# Altium PCB piano1组.PcbDoc
Units mil, origin at the board's own origin, x right, y up, seen from the top; angles counter-clockwise.
Board outline 3759.84 x 3838.58 mil, 2 copper layers (Top Layer, Bottom Layer); 40 components, 39 nets, 194 pads, 10 vias.
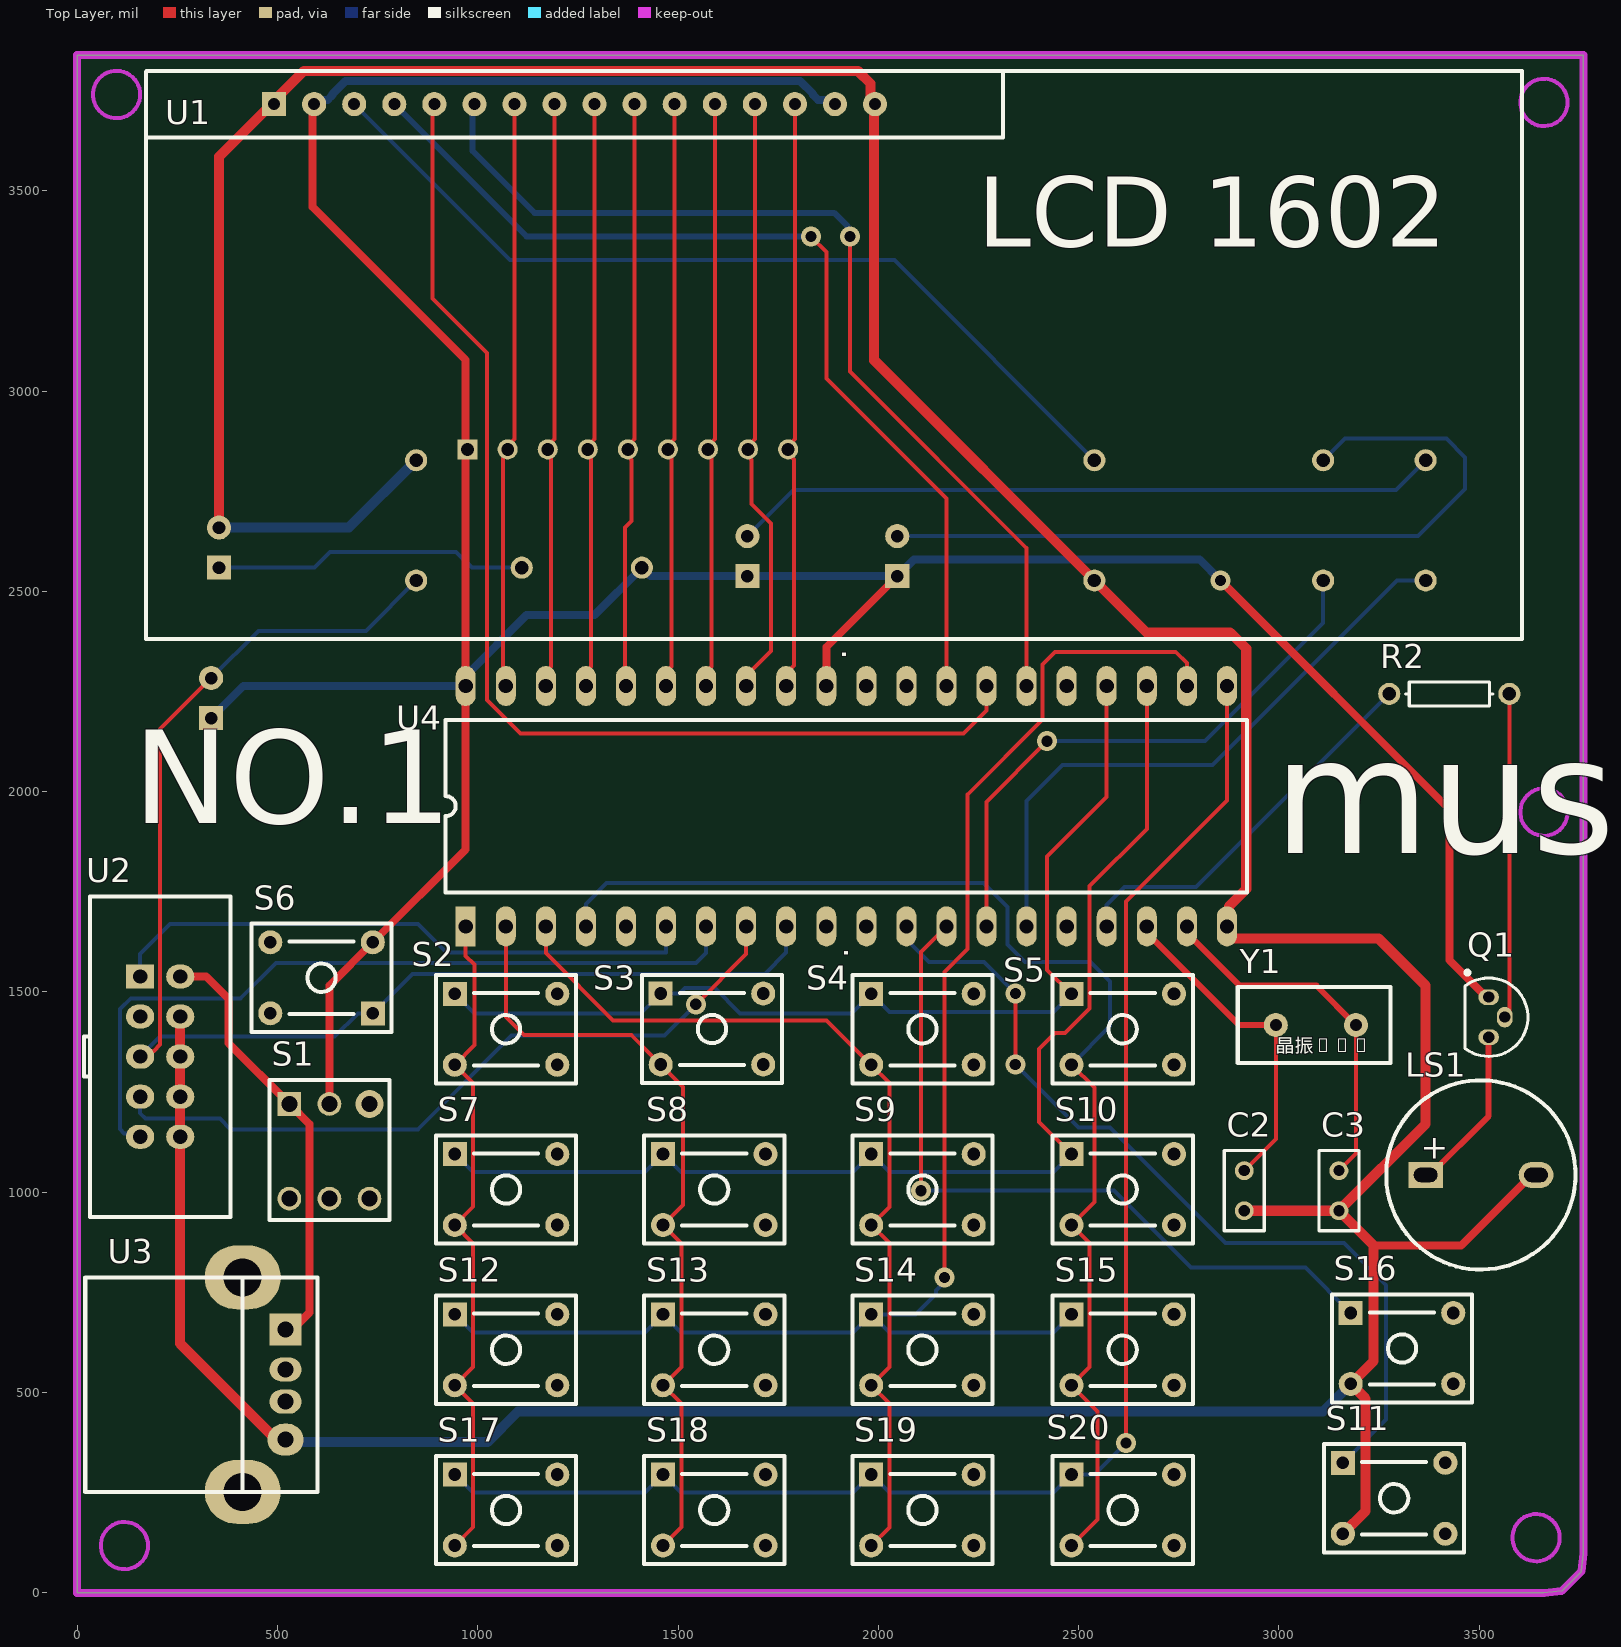
[diagram p0: Top Layer view]
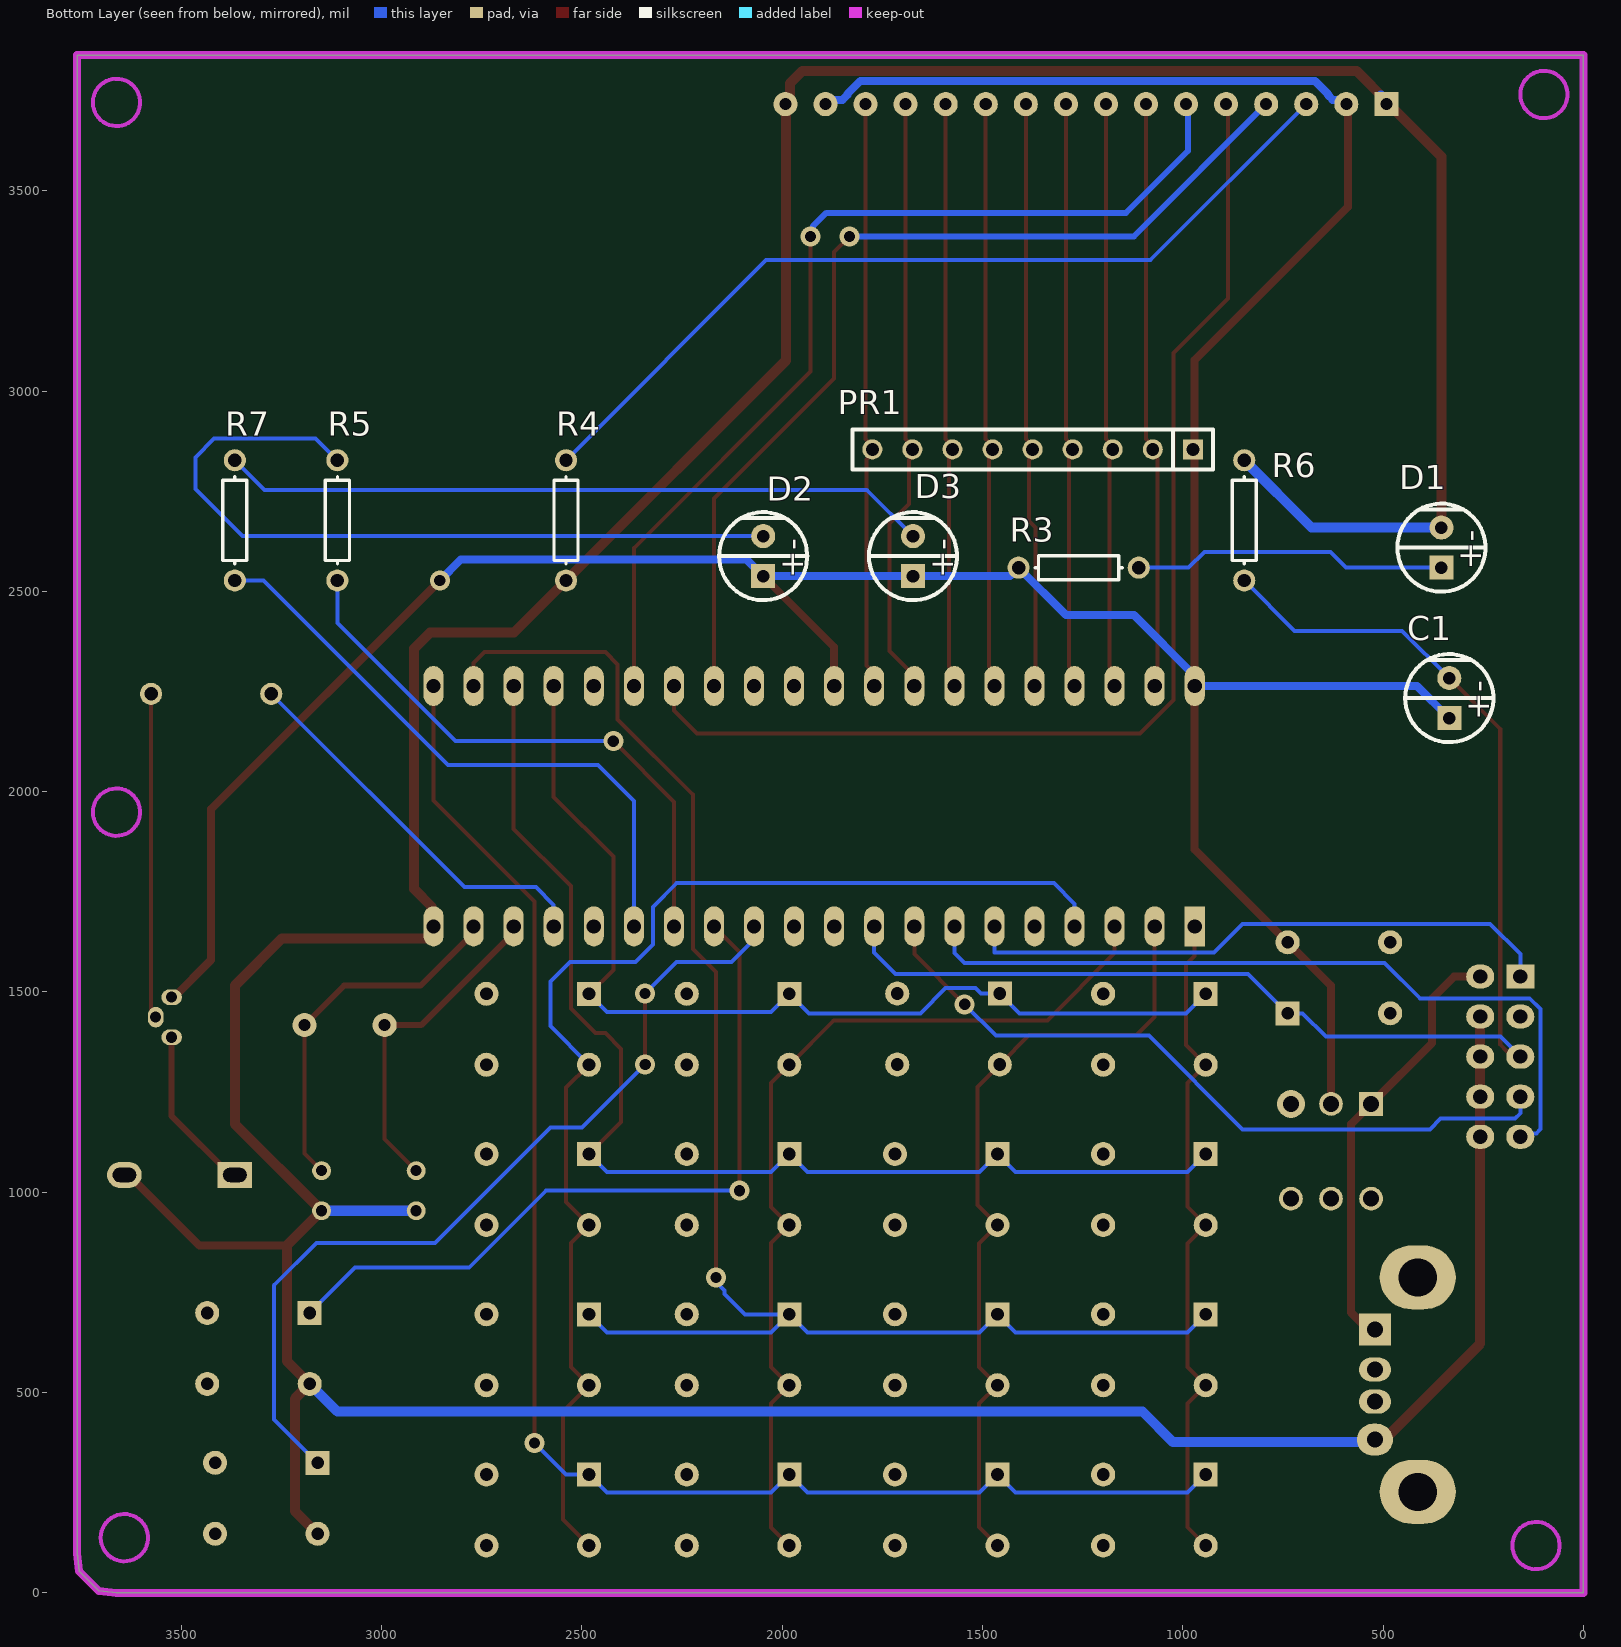
[diagram p1: Bottom Layer view, seen from below]

## Layer stack, top to bottom
Top Solder: solder mask 0.4, Solder Resist, Dk 3.5
Top Layer: signal copper 1.4
Dielectric 1: dielectric 12.6, FR-4, Dk 4.8
Bottom Layer: signal copper 1.4
Bottom Solder: solder mask 0.4, Solder Resist, Dk 3.5

## Board outline
0,0 0,3838.58 3759.84,3838.58 3759.84,98.43 3754.92,54.13 3705.71,4.92 3661.42,0

## Design rules (kind name [scope] priority, off if disabled: settings)
Clearance [All] p1: gap=10 ignorepadtopadclearanceinfootprint=FALSE
PolygonConnect [All] p1: connectstyle=Relief reliefconductorwidth=10 reliefentries=4 polygonreliefangle="90 Angle" airgapwidth=10
RoutingVias [All] p1: holewidth=28 width=50 viastyle="Through Hole" minholewidth=28 minwidth=50 maxholewidth=28 maxwidth=50
SolderMaskExpansion [All] p1: expansion=4 istentingtop=FALSE
Width Width_V [InNet('V')] p1: maxlimit=50 minlimit=10 preferedwidth=20 minimp=50.000000 maximp=50.000000 favimp=50.000000
Width Width_GND [InNet('GND')] p2: maxlimit=50 minlimit=10 preferedwidth=25 minimp=50.000000 maximp=50.000000 favimp=50.000000
Width Width_VCC [InNet('VCC')] p3: maxlimit=50 minlimit=10 preferedwidth=20 minimp=50.000000 maximp=50.000000 favimp=50.000000
Width [All] p4: maxlimit=15 minlimit=10 preferedwidth=10 minimp=50.000000 maximp=50.000000 favimp=50.000000
30 further rules are at their usual default settings.

## Components (designator, comment, footprint, x,y, rotation, side; value= is the part's Value field where it differs from the comment)
C1 "Cap Pol1" RB0.1 334.65,2183.46 r90 bottom value=10uF
C2 "Cap" RAD-0.1 2913.39,1003.94 r90 top value=30pF
C3 "Cap" RAD-0.1 3149.61,1003.94 r90 top value=30pF
D1 "LED0" RB0.1 354.33,2559.06 r90 bottom
D2 "LED0" RB0.1 2047.24,2537.8 r90 bottom
D3 "LED0" RB0.1 1673.23,2537.8 r90 bottom
LS1 "Speaker" Speaker 3503.94,1043.31 r0 top
PR1 "PR" SIP9 974.8,2854.33 r270 bottom
Q1 "2N3906" TO-92-M 3523.62,1437.01 r270 top
R2 "1K" AXIAL-0.3 3425.2,2244.09 r180 top value=10K
R3 "510" AXIAL-0.3 1259.84,2559.06 r180 bottom
R4 "1K" AXIAL-0.3 2539.37,2677.17 r270 bottom value=10K
R5 "1K" AXIAL-0.3 3110.24,2677.17 r90 bottom value=10K
R6 "10K" AXIAL-0.3 846.46,2677.17 r270 bottom
R7 "1K" AXIAL-0.3 3366.14,2677.17 r90 bottom value=10K
S1 "SW-SPDT" "KEY-6 - duplicate" 529.92,1220.47 r0 top
S2 "" SPST6*6 1070.71,1406.91 r0 top
S3 "" SPST6*6 1584.64,1407.48 r0 top
S4 "" SPST6*6 2110.08,1406.91 r0 top
S5 "" SPST6*6 2610.08,1406.91 r0 top
S6 "RESET" SPST6*6 610.24,1535.43 r180 top
S7 "" SPST6*6 1070.71,1006.91 r0 top
S8 "" SPST6*6 1590.39,1006.91 r0 top
S9 "" SPST6*6 2110.08,1006.91 r0 top
S10 "" SPST6*6 2610.08,1006.91 r0 top
S11 "RESET" SPST6*6 3287.4,236.22 r0 top
S12 "" SPST6*6 1070.71,606.91 r0 top
S13 "" SPST6*6 1590.39,606.91 r0 top
S14 "" SPST6*6 2110.08,606.91 r0 top
S15 "" SPST6*6 2610.08,606.91 r0 top
S16 "RESET" SPST6*6 3307.09,610.24 r0 top
S17 "" SPST6*6 1070.71,206.91 r0 top
S18 "" SPST6*6 1590.39,206.91 r0 top
S19 "" SPST6*6 2110.08,206.91 r0 top
S20 "" SPST6*6 2610.08,206.91 r0 top
U1 "lcd1602" LCD1602 491.73,3716.14 r180 top
U2 "ISP" IDC10 157.48,1538.58 r0 top
U3 "USB-A" USB_A 520.39,657.4 r90 top
U4 "AT89S52" DIP40_51MCU 970.08,1663.78 r90 top
Y1 "12M" XTAL1 3192.13,1417.32 r90 top

## Footprints (in the part's own frame and the unit in brackets; to place one, negate y for a bottom-side part, rotate by r counter-clockwise, add the part's x,y. Pads: shape width x height; smd on the part's side, far side on the other; paste and mask are expansions set on the pad)
AXIAL-0.3 [mm] "Axial Device, Thru-Hole; 2 Leads; 0.3 in Pin Spacing"
  round 1.4 hole 0.85: 1(-3.81,0) 2(3.81,0)
  silkscreen extent -2.77,-0.76 2.77,0.76
DIP40_51MCU [mm]
  rect 2.54x1.27 hole 0.9: 1(0,0)
  oval 2.54x1.27 hole 0.9: 2(0,-2.54) 3(0,-5.08) 4(0,-7.62) 5(0,-10.16) 6(0,-12.7) 7(0,-15.24) 8(0,-17.78) 9(0,-20.32) 10(0,-22.86) 11(0,-25.4) 12(0,-27.94) 13(0,-30.48) 14(0,-33.02) 15(0,-35.56) 16(0,-38.1) 17(0,-40.64) 18(0,-43.18) 19(0,-45.72) 20(0,-48.26) 21(15.24,-48.26) 22(15.24,-45.72) 23(15.24,-43.18) 24(15.24,-40.64) 25(15.24,-38.1) 26(15.24,-35.56) 27(15.24,-33.02) 28(15.24,-30.48) 29(15.24,-27.94) 30(15.24,-25.4) 31(15.24,-22.86) 32(15.24,-20.32) 33(15.24,-17.78) 34(15.24,-15.24) 35(15.24,-12.7) 36(15.24,-10.16) 37(15.24,-7.62) 38(15.24,-5.08) 39(15.24,-2.54) 40(15.24,0)
  silkscreen extent 2.16,-49.53 13.08,1.27
IDC10 [mil]
  rect 70x60 hole 35.43: 1(0,0)
  oval 70x60 hole 35.43: 2(100,0) 3(0,-100) 4(100,-100) 5(0,-200) 6(100,-200) 7(0,-300) 8(100,-300) 9(0,-400) 10(100,-400)
  silkscreen extent -140,-600 225,200
"KEY-6 - duplicate" [mm]
  rect 1.5x1.5 hole 1: 1(0,0)
  round 1.5 hole 1: 2(2.54,0) 4(5.08,-6) 5(2.54,-6) 6(0,-6)
  round 1.778 hole 1: 3(5.08,0)
  silkscreen extent -1.27,-7.37 6.35,1.52
LCD1602 [mil]
  rect 60x60 hole 30: 1(0,0)
  round 60 hole 30: 2(-100,0) 3(-200,0) 4(-300,0) 5(-400,0) 6(-500,0) 7(-600,0) 8(-700,0) 9(-800,0) 10(-900,0) 11(-1000,0) 12(-1100,0) 13(-1200,0) 14(-1300,0) 15(-1400,0) 16(-1500,0)
  silkscreen extent -3115,-83 320,1335
RAD-0.1 [mm] "Radial Cap, Thru-Hole; 2 Leads; 0.1 in Pin Spacing"
  round 1.2 hole 0.7: 1(-1.27,0) 2(1.27,0)
  silkscreen extent -2.54,-1.27 2.54,1.27
RB0.1 [mil]
  rect 60x60 hole 31.5: 1(0,0)
  round 60 hole 31.5: 2(100,0)
  silkscreen extent -60,-110 160,110
SIP9 [mil]
  rect 50x50 hole 32: 1(0,0)
  round 50 hole 32: 2(0,-100) 3(0,-200) 4(0,-300) 5(0,-400) 6(0,-500) 7(0,-600) 8(0,-700) 9(0,-800)
  silkscreen extent -50,-850 50,50
Speaker [mm]
  rect 2.2x1.651 hole 0.9 slot 1.5 at 0 deg: 1(-3.5,0)
  oval 2.2x1.651 hole 0.9 slot 1.5 at 0 deg: 2(3.5,0)
  silkscreen extent -6,-6 6,6, body extent -6,-6 6,6, height 9.6
SPST6*6 [mil]
  rect 60x60 hole 31.5: 1(-127.95,88.58)
  round 60 hole 31.5: 2(-127.95,-88.58) 3(127.95,88.58) 4(127.95,-88.58)
  silkscreen extent -175,-135 175,135
TO-92-M [mm]
  oval 1x1.3 hole 0.7: 1(-1.27,0) 3(1.27,0)
  oval 1.3x1 hole 0.7: 2(0,1.016)
  silkscreen extent -2.95,-1.5 2.48,2.48
USB_A [mil]
  rect 80x80 hole 40: 1(0,0)
  oval 60x80 hole 40: 2(-100,0) 3(-180,0)
  oval 80x90 hole 40: 4(-275,0)
  oval 160x190 hole 95: 5(-405,107) 6(130,107)
  silkscreen extent -405,-80 130,500
XTAL1 [mil]
  round 60 hole 30: 1(0,0) 2(0,200)
  silkscreen extent -95,-86 95,295

## Part data
C1: "Polarized Capacitor (Radial)", LatestRevisionDate=17-Jul-2002, LatestRevisionNote="Re-released for DXP Platform.", PackageDescription="Polarized Capacitor (Radial); 2 Leads", PackageReference=RB7.6-15, Published=8-Jun-2000, Publisher="Altium Limited"
C2 C3: "Capacitor", LatestRevisionDate=17-Jul-2002, LatestRevisionNote="Re-released for DXP Platform.", PackageDescription="Radial Cap, Thru-Hole; 2 Leads; 0.3 in Pin Spacing", PackageReference=RAD-0.3, Published=8-Jun-2000, Publisher="Altium Limited"
D1 D2 D3: "Typical INFRARED GaAs LED", LatestRevisionDate=08-Jul-2005, LatestRevisionNote="Mech Layer 1 removed.", PackageDescription="LED; 2 Leads", PackageReference=LED-0, Published=8-Jun-2000, Publisher="Altium Limited"
LS1: "Loudspeaker", LatestRevisionDate=17-Jul-2002, LatestRevisionNote="Re-released for DXP Platform.", PackageReference=PIN2, Published=24-Mar-1999, Publisher="Altium Limited"
Q1: "PNP General Purpose Amplifier", ComponentLink1Description="Manufacturer Link", ComponentLink1URL=http://www.fairchildsemi.com/, ComponentLink2Description=Datasheet, ComponentLink2URL=http://www.fairchildsemi.com/ds/2N%2F2N3906.pdf, DatasheetVersion=1997, LatestRevisionDate=15-Jan-2003, LatestRevisionNote="PCB Footprint 'BCY-W3/D4.7' replaced", PackageDescription="TO, Flat Index; 3 In-Line, Axial Leads; Body Dia. 4.5mm; Leads 0.51 x 0.48 mm (max)", PackageReference=TO-92A, PackageVersion=Sep-1998, Published=8-Jun-2000, Publisher="Altium Limited"
R2 R3 R4 R5 R6 R7: library part Res2, "Resistor", LatestRevisionDate=17-Jul-2002, LatestRevisionNote="Re-released for DXP Platform.", PackageDescription="Axial Device, Thru-Hole; 2 Leads; 0.4 in Pin Spacing", PackageReference=AXIAL-0.4, Published=8-Jun-2000, Publisher="Altium Limited"
S1: "SPDT Subminiature Toggle Switch, Right Angle Mounting, Vertical Actuation", ComponentLink1Description="Manufacturer Link", ComponentLink1URL=http://www.apem.com, DatasheetVersion=05-Dec-2000, LatestRevisionDate=17-Dec-2003, LatestRevisionNote="Schematic revised, PCB Footprint replaced.", PackageDescription="Switch; 4 Leads", PackageReference=TL36WW15050, Published=24-Mar-1999, Publisher="Altium Limited"
S2 S3 S4 S5 S6 S7 S8 S9 S10 S11 S12 S13 S14 S15 S16 S17 S18 S19 S20: library part SW-PB, "Switch", LatestRevisionDate=17-Jul-2002, LatestRevisionNote="Re-released for DXP Platform.", PackageDescription="Switch; 2 Leads", PackageReference=SPST-2, Published=24-Mar-1999, Publisher="Altium Limited"
Y1: library part XTAL, "Crystal Oscillator", LatestRevisionDate=17-Jul-2002, LatestRevisionNote="Re-released for DXP Platform.", PackageDescription="Crystal, Thru-Hole; 2 Leads; Body 3.1 x 8.2 mm (Dia.xH)", PackageReference=R38, Published=8-Jun-2000, Publisher="Altium Limited"

## Via types
v1: diameter 50, hole 28, Top Layer to Bottom Layer, 10 vias

## Nets (pads, with @x,y where several pads share a name; then routed paths per layer and width w, separated by ;. In a path a pad name is that pad's centre, name@x,y a point inside that pad or via, vN(x,y) a via of type N, cw(c..) or ccw(c..) an arc to the next point about the centre after c; other vN are vias at no path point)
EN: U1.6 U4.26 | length 2467.6
  Top Layer w10: v1(1929.13,3385.83) 1929.13,3048.55 2370.08,2607.61 U4.26
  Bottom Layer w15: U1.6@987.4,3720.47 987.4,3599.21 1141.73,3444.88 1889.76,3444.88 1922.44,3412.21 1922.44,3392.52 v1(1929.13,3385.83)
GND: C2.1 C3.1 D1.2 LS1.2 R4.2 R6.1 S11.2 S16.2 U1.1 U1.16 U2.4 U2.6 U2.8 U2.10 U3.4 U4.20 | length 12854.4
  Top Layer w20: 3236.36,867.18 3454.8,867.18 3630.93,1043.31 LS1.2
  Top Layer w25: U2.4 U2.6 U2.8 U2.10 257.48,622.2 503.5,376.18 U3.4@531.5,376.18 ; D1.2 354.33,3585.04 U1.1@489.76,3720.47 ; U1.1@487.4,3720.47 566.14,3799.21 1948.82,3799.21 1980.7,3767.33 1980.7,3727.17 U1.16@1987.4,3720.47 ; U1.16@1989.76,3720.47 1989.76,3076.77 R4.2 2669.21,2397.32 2878.36,2397.32 2918.36,2357.32 2918.36,1756.94 2874.86,1713.44 2874.86,1646.1 2870.08,1641.32 2877.4,1634 2897.09,1634 2897.22,1633.86 3248.03,1633.86 3366.14,1515.75 3366.14,1170.72 3149.36,953.94 C2.1 ; C3.1 3236.36,867.18 3236.36,578.88 S16.2 3216.36,484.43 3216.36,204.55 S11.2
  Bottom Layer w25: D1.2 678.35,2659.05 R6.1 ; U1.1@487.4,3720.47 U1.1@504.9,3737.97 ; U3.4@531.5,376.18 1024.22,376.18 1100.8,452.76 3110.24,452.76 S16.2 ; C2.1 C3.1
NetC2_2: C2.2 U4.18 Y1.2 | length 829.2
  Top Layer w10: C2.2 2992.13,1132.68 Y1.2
  Top Layer w15: U4.18 2670.08,1648.25 2901.01,1417.32 Y1.2
NetC3_2: C3.2 U4.19 Y1.1 | length 914.2
  Top Layer w10: C3.2 3192.13,1096.46 Y1.1
  Top Layer w15: U4.19 2770.08,1648.25 2902.58,1515.75 3093.7,1515.75 Y1.1
NetD1_1: D1.1 R3.2 | length 788.1
  Bottom Layer w10: D1.1 592.36,2559.05 631.73,2598.43 946.26,2598.43 985.63,2559.05 R3.2
NetD2_2: D2.2 R5.2 | length 1941.1
  Bottom Layer w10: D2.2 3346.46,2637.79 3464.57,2755.91 3464.57,2834.65 3417.89,2881.32 3164.39,2881.32 R5.2
NetD3_2: D3.2 R7.2 | length 1771.4
  Bottom Layer w10: D3.2 1788.76,2753.32 3292.3,2753.32 R7.2
NetLS1_1: LS1.1 Q1.3 | length 415.3
  Top Layer w15: LS1.1 3376.95,1043.31 3523.62,1189.98 Q1.3
NetQ1_2: Q1.2 R2.1 | length 807.3
  Top Layer w10: R2.1 3575.36,2244.09 Q1.2@3575.36,1437.01
NetR4_1: R4.1 U1.3 | length 2222
  Bottom Layer w10: U1.3@687.4,3720.47 1081.1,3326.77 2039.76,3326.77 R4.1
P00: PR1.2 U1.7 U4.39 | length 1467.2
  Top Layer w10: U4.39 1062.99,2270.86 1062.99,2831.7 1074.8,2843.51 1074.8,2863.26 1091.73,2880.19 U1.7
P01: PR1.3 U1.8 U4.38 | length 1474.6
  Top Layer w10: U4.38 1170.08,2299.6 1183.4,2312.93 1183.4,2834.91 1182.46,2835.85 PR1.3@1182.46,2863.61 ; PR1.3 1183.27,2862.8 1183.27,2871.72 1191.73,2880.19 U1.8
P02: PR1.4 U1.9 U4.37 | length 1472.7
  Top Layer w10: U4.37 1270.08,2299.6 1283.4,2312.93 1283.4,2834.91 1282.46,2835.85 PR1.4@1282.46,2861.71 ; PR1.4 1282.32,2861.85 1282.32,2870.78 1291.73,2880.19 U1.9
P03: PR1.5 U1.10 U4.36 | length 1475
  Top Layer w10: U4.36 1367.28,2266.57 1367.28,2659.42 1383.4,2675.54 1383.4,2828.47 1382.46,2829.42 PR1.5@1382.46,2861.71 ; PR1.5 1382.32,2861.85 1382.32,2870.78 1391.73,2880.19 U1.10
P04: PR1.6 U1.11 U4.35 | length 1457.4
  Top Layer w10: U4.35 1470.08,2299.6 1483.4,2312.93 1483.4,2834.91 1482.46,2835.85 1482.46,2845.06 PR1.6@1483.4,2846 ; PR1.6 1474.8,2863.26 1491.73,2880.19 U1.11
P05: PR1.7 U1.12 U4.34 | length 1472.7
  Top Layer w10: U4.34 1570.08,2299.6 1583.4,2312.93 1583.4,2834.91 1582.46,2835.85 PR1.7@1582.46,2861.71 ; PR1.7 1582.32,2861.85 1582.32,2870.78 1591.73,2880.19 U1.12
P06: PR1.8 U1.13 U4.33 | length 1509
  Top Layer w10: U4.33 1670.08,2288.78 1732.28,2350.98 1732.28,2668.92 1683.4,2717.8 1683.4,2828.47 1682.46,2829.42 1682.46,2846.68 PR1.8 1674.8,2863.26 1691.73,2880.19 U1.13
P07: PR1.9 U1.14 U4.32 | length 1483.9
  Top Layer w10: U4.32 1770.08,2294.95 1789.76,2314.64 1789.76,2828.55 1782.46,2835.85 1782.46,2847.02 1789.76,2854.33 PR1.9@1782.46,2861.64 ; PR1.9 1782.28,2861.81 1782.28,2870.74 1791.73,2880.19 U1.14
P10: S2.2 S7.2 S12.2 S17.2 U4.1 | length 1688.6
  Top Layer w10: S17.2 988.36,163.93 988.36,472.72 S12.2 988.36,563.93 988.36,872.72 S7.2 988.36,963.93 988.36,1272.72 S2.2 992.36,1367.93 992.36,1568.04 970.08,1590.32 U4.1
P11: S3.2 S8.2 S13.2 S18.2 U4.2 | length 1982.5
  Top Layer w10: U4.2 1070.08,1437.32 1115.08,1392.32 1383.27,1392.32 S3.2 1512.36,1263.23 1512.36,968.24 S8.2 1508.36,872.4 1508.36,564.24 S13.2 1508.36,472.4 1508.36,164.24 S18.2
P12: S4.2 S9.2 S14.2 S19.2 U4.3 | length 2306.5
  Top Layer w10: U4.3 1170.08,1597.32 1338.08,1429.32 1871.13,1429.32 S4.2 2027.36,1273.09 2027.36,963.56 S9.2 2027.36,873.09 2027.36,563.56 S14.2 2027.36,473.09 2027.36,163.56 S19.2
P13: S5.2 S10.2 S15.2 S20.2 U4.4 | length 3129.3
  Top Layer w10: S20.2 2547.13,183.32 2547.13,453.32 S15.2 2527.36,563.56 2527.36,873.09 S10.2 2539.37,975.57 2539.37,1261.08 S5.2
  Bottom Layer w10: U4.4 1270.08,1720.04 1321.69,1771.65 2263.03,1771.65 2322.83,1711.85 2322.83,1618.31 2366.34,1574.8 2529.88,1574.8 2578.74,1525.94 2578.74,1414.94 S5.2
P15: U2.1 U4.6 | length 1494.3
  Bottom Layer w10: U2.1 157.48,1594.32 232.48,1669.32 851.36,1669.32 922.36,1598.32 1470.08,1598.32 U4.6
P16: U2.9 U4.7 | length 1944.9
  Bottom Layer w10: U2.9 148.72,1147.34 117.6,1147.34 107.36,1157.58 107.36,1457.32 134.36,1484.32 408.36,1484.32 496.36,1572.32 1545.08,1572.32 1570.08,1597.32 U4.7
P17: U2.7 U4.8 | length 1820.5
  Top Layer w10: v1(1544.36,1469.32) 1670.08,1595.04 U4.8
  Bottom Layer w10: U2.7 157.48,1197.32 170.48,1184.32 356.36,1184.32 383.36,1157.32 850.36,1157.32 1084.36,1391.32 1466.36,1391.32 v1(1544.36,1469.32)
P20: S17.1 S18.1 S19.1 S20.1 U4.21 | length 3844.6
  Top Layer w10: S20.1@2460.65,316.97 S20.1 ; v1(2618.11,374.02) 2618.11,1726.35 2870.08,1978.32 U4.21
  Bottom Layer w10: S17.1 987.92,250.32 1417.28,250.32 S18.1 1507.61,250.32 1936.96,250.32 S19.1 2027.29,250.32 2436.96,250.32 S20.1 2539.58,295.49 v1(2618.11,374.02)
P21: S12.1 S13.1 S14.1 S15.1 U4.22 | length 3956.7
  Top Layer w10: v1(2165.35,787.4) 2165.35,1550.31 2222.36,1607.32 2222.36,1992.32 2410.36,2180.32 2410.36,2317.32 2441.36,2348.32 2742.36,2348.32 2770.08,2320.61 U4.22
  Bottom Layer w10: S12.1 987.92,650.32 1417.28,650.32 S13.1 1507.61,650.32 1936.96,650.32 S14.1 ; v1(2165.35,787.4) 2165.35,776.58 2143.38,754.6 2143.38,745.74 2093.12,695.49 S14.1 ; S15.1 2436.96,650.32 2027.29,650.32 S14.1
P22: S7.1 S8.1 S9.1 S10.1 U4.23 | length 2978.9
  Top Layer w10: S10.1 2401.57,1176.04 2401.57,1358.27 2440.94,1397.64 2465.49,1397.64 2527.13,1459.27 2527.13,1764.09 2670.08,1907.04 U4.23
  Bottom Layer w10: S7.1 987.92,1050.32 1417.28,1050.32 S8.1 1507.61,1050.32 1936.96,1050.32 S9.1 2027.29,1050.32 2436.96,1050.32 S10.1
P23: S2.1 S3.1 S4.1 S5.1 U4.24 | length 2549
  Top Layer w10: S5.1@2480.32,1496.06 2421.26,1555.12 2421.26,1838.22 2570.08,1987.04 U4.24 ; S5.1 S5.1@2500,1513.36
  Bottom Layer w10: S2.1 991.92,1446.32 1406.95,1446.32 S3.1 1504.02,1496.06 1517.55,1509.59 1591.87,1509.59 1655.13,1446.32 1932.96,1446.32 S4.1 2027.29,1450.32 2436.96,1450.32 S5.1
P32: S11.1 U4.12 | length 2180.7
  Top Layer w10: v1(2341.89,1318.9) 2342.2,1319.21 2342.2,1495.75 v1(2342.52,1496.06)
  Bottom Layer w10: U4.12 2070.08,1630.71 2125.98,1574.8 2263.78,1574.8 v1(2342.52,1496.06) ; v1(2341.89,1318.9) 2342.52,1318.9 2500,1161.42 2578.74,1161.42 2866.83,873.32 3162.36,873.32 3267.72,767.97 3267.72,433.07 S11.1
P33: S16.1 U4.13 | length 1885.5
  Top Layer w10: v1(2106.3,1003.94) 2106.3,1600 U4.13
  Bottom Layer w10: v1(2106.3,1003.94) 2588.78,1003.94 2780.96,811.75 3066.2,811.75 S16.1
P34: R5.1 U4.14 | length 1442
  Top Layer w10: U4.14 2270.08,1974.8 v1(2421.26,2125.98)
  Bottom Layer w10: v1(2421.26,2125.98) 2814.96,2125.98 3110.24,2421.26 R5.1
P35: R7.1 U4.15 | length 1536.8
  Bottom Layer w10: U4.15 2370.08,1976.38 2459.91,2066.21 2833.92,2066.21 3294.88,2527.16 R7.1
P37: R2.2 U4.17 | length 976.9
  Bottom Layer w10: U4.17 2570.08,1717.32 2614.79,1762.04 2793.14,1762.04 R2.2
RS: U1.4 U4.28 | length 2445.1
  Top Layer w10: v1(1831.73,3385.83) 1831.73,3384.8 1870.08,3346.46 1870.08,3031.5 2170.08,2731.5 U4.28
  Bottom Layer w15: U1.4@787.4,3720.47 1122.05,3385.83 v1(1831.73,3385.83)
RST: C1.2 R6.2 S6.1 U2.5 U4.9 | length 3428.6
  Top Layer w10: U2.5 176.01,1338.58 190.49,1353.06 191.64,1353.06 207.48,1368.9 207.48,2156.3 C1.2
  Bottom Layer w10: U2.5 157.48,1339.32 206.48,1388.32 642.36,1388.32 700.89,1446.85 S6.1 836.66,1545.32 1717.08,1545.32 1770.08,1598.32 U4.9 ; C1.2 452.76,2401.57 720.87,2401.57 R6.2
RW: U1.5 U4.27 | length 2913.5
  Top Layer w10: U1.5@887.4,3720.47 887.4,3231.06 1023.62,3094.84 1023.62,2228.67 1106.62,2145.67 2212.62,2145.67 2270.08,2203.13 U4.27
V: S1.1 U2.2 U3.1 | length 1079.4
  Top Layer w20: U2.2 322.36,1538.58 377.36,1483.58 377.36,1373.03 S1.1 580.36,1170.03 580.36,700.05 U3.1@531.5,651.18
VCC: C1.1 D2.1 D3.1 PR1.1 Q1.1 R3.1 S1.2 S6.2 U1.2 U1.15 U4.31 U4.40 | length 8551.8
  Top Layer w20: U1.2@587.4,3720.47 587.4,3459.84 970.08,3077.17 U4.40 ; S1.2 629.92,1515.75 S6.2 970.08,1855.9 U4.40@970.08,2263.32 ; U4.31 1870.08,2360.63 D2.1 ; v1(2854.33,2527.16) 3425.2,1956.3 3425.2,1579.53 3517.72,1487.01 Q1.1
  Bottom Layer w20: C1.1 414.96,2263.78 U4.40 970.08,2288.98 1122.05,2440.94 1291.73,2440.94 R3.1 1431.1,2537.79 D3.1 D2.1 2088.77,2579.32 2802.17,2579.32 v1(2854.33,2527.16) ; U1.2@589.76,3720.47 596.33,3727.04 625.69,3727.04 637.4,3738.76 637.4,3741.18 669.96,3773.74 1804.84,3773.74 1837.4,3741.18 1837.4,3738.76 1849.12,3727.04 1883.2,3727.04 U1.15@1889.76,3720.47
pads on no net: S1.3 S1.4 S1.5 S1.6 S2.3 S2.4 S3.3 S3.4 S4.3 S4.4 S5.3 S5.4 S6.3 S6.4 S7.3 S7.4 S8.3 S8.4 S9.3 S9.4 S10.3 S10.4 S11.3 S11.4 S12.3 S12.4 S13.3 S13.4 S14.3 S14.4 S15.3 S15.4 S16.3 S16.4 S17.3 S17.4 S18.3 S18.4 S19.3 S19.4 S20.3 S20.4 U2.3 U3.2 U3.3 U3.5 U3.6 U4.5 U4.10 U4.11 U4.16 U4.25 U4.29 U4.30

## Keep-outs
Keep-Out Layer:
  circle w10: c3661.42,1948.82 r59.06
  circle w10: c3661.42,3720.47 r59.06
  circle w10: c98.43,3740.16 r59.06
  circle w10: c3641.73,137.8 r59.06
  circle w10: c118.11,118.11 r59.06
  lines w19.68: 0,0 3661.42,0 3705.71,4.92 3754.92,54.13 3759.84,98.42 3759.84,3838.58 0,3838.58 0,0

## Silkscreen, mask and mechanical layers (free items; w line width, h text height)
Top Overlay:
  text "NO.1" at 140.75,1844.61 h400
  text "music" at 2986.77,1750.38 h500

## Text inside footprints (layer, text, board x,y; h text height)
C1: Bottom Overlay "-" at 234.65,2248.46 h60 r270; Bottom Overlay "+" at 234.65,2178.46 h60 r270
D1: Bottom Overlay "-" at 254.33,2624.06 h60 r270; Bottom Overlay "+" at 254.33,2554.06 h60 r270
D2: Bottom Overlay "+" at 1947.24,2532.8 h60 r270; Bottom Overlay "-" at 1947.24,2602.8 h60 r270
D3: Bottom Overlay "-" at 1573.23,2602.8 h60 r270; Bottom Overlay "+" at 1573.23,2532.8 h60 r270
LS1: Top Overlay "+" at 3353.94,1083.31 h60
U1: Top Overlay "LCD 1602" at 2248.43,3302.76 h300
Y1: Top Overlay "晶振12M" at 2992.13,1337.32 h60